# Altium PCB STM_System_Board.PCBDOC (part 7 of 16)
Units mm, origin at the board's own origin, x right, y up, seen from the top; angles counter-clockwise.
Board outline 222.53 x 100.01 mm, 6 copper layers (Top Layer, Int1 (GND), Int2 (Sign), Layer 1, Layer 2, Bottom Layer), stack 1.526 mm thick; 702 components, 774 nets, 3596 pads, 1988 vias.
Unrouted connection lines stored in the file: 1.
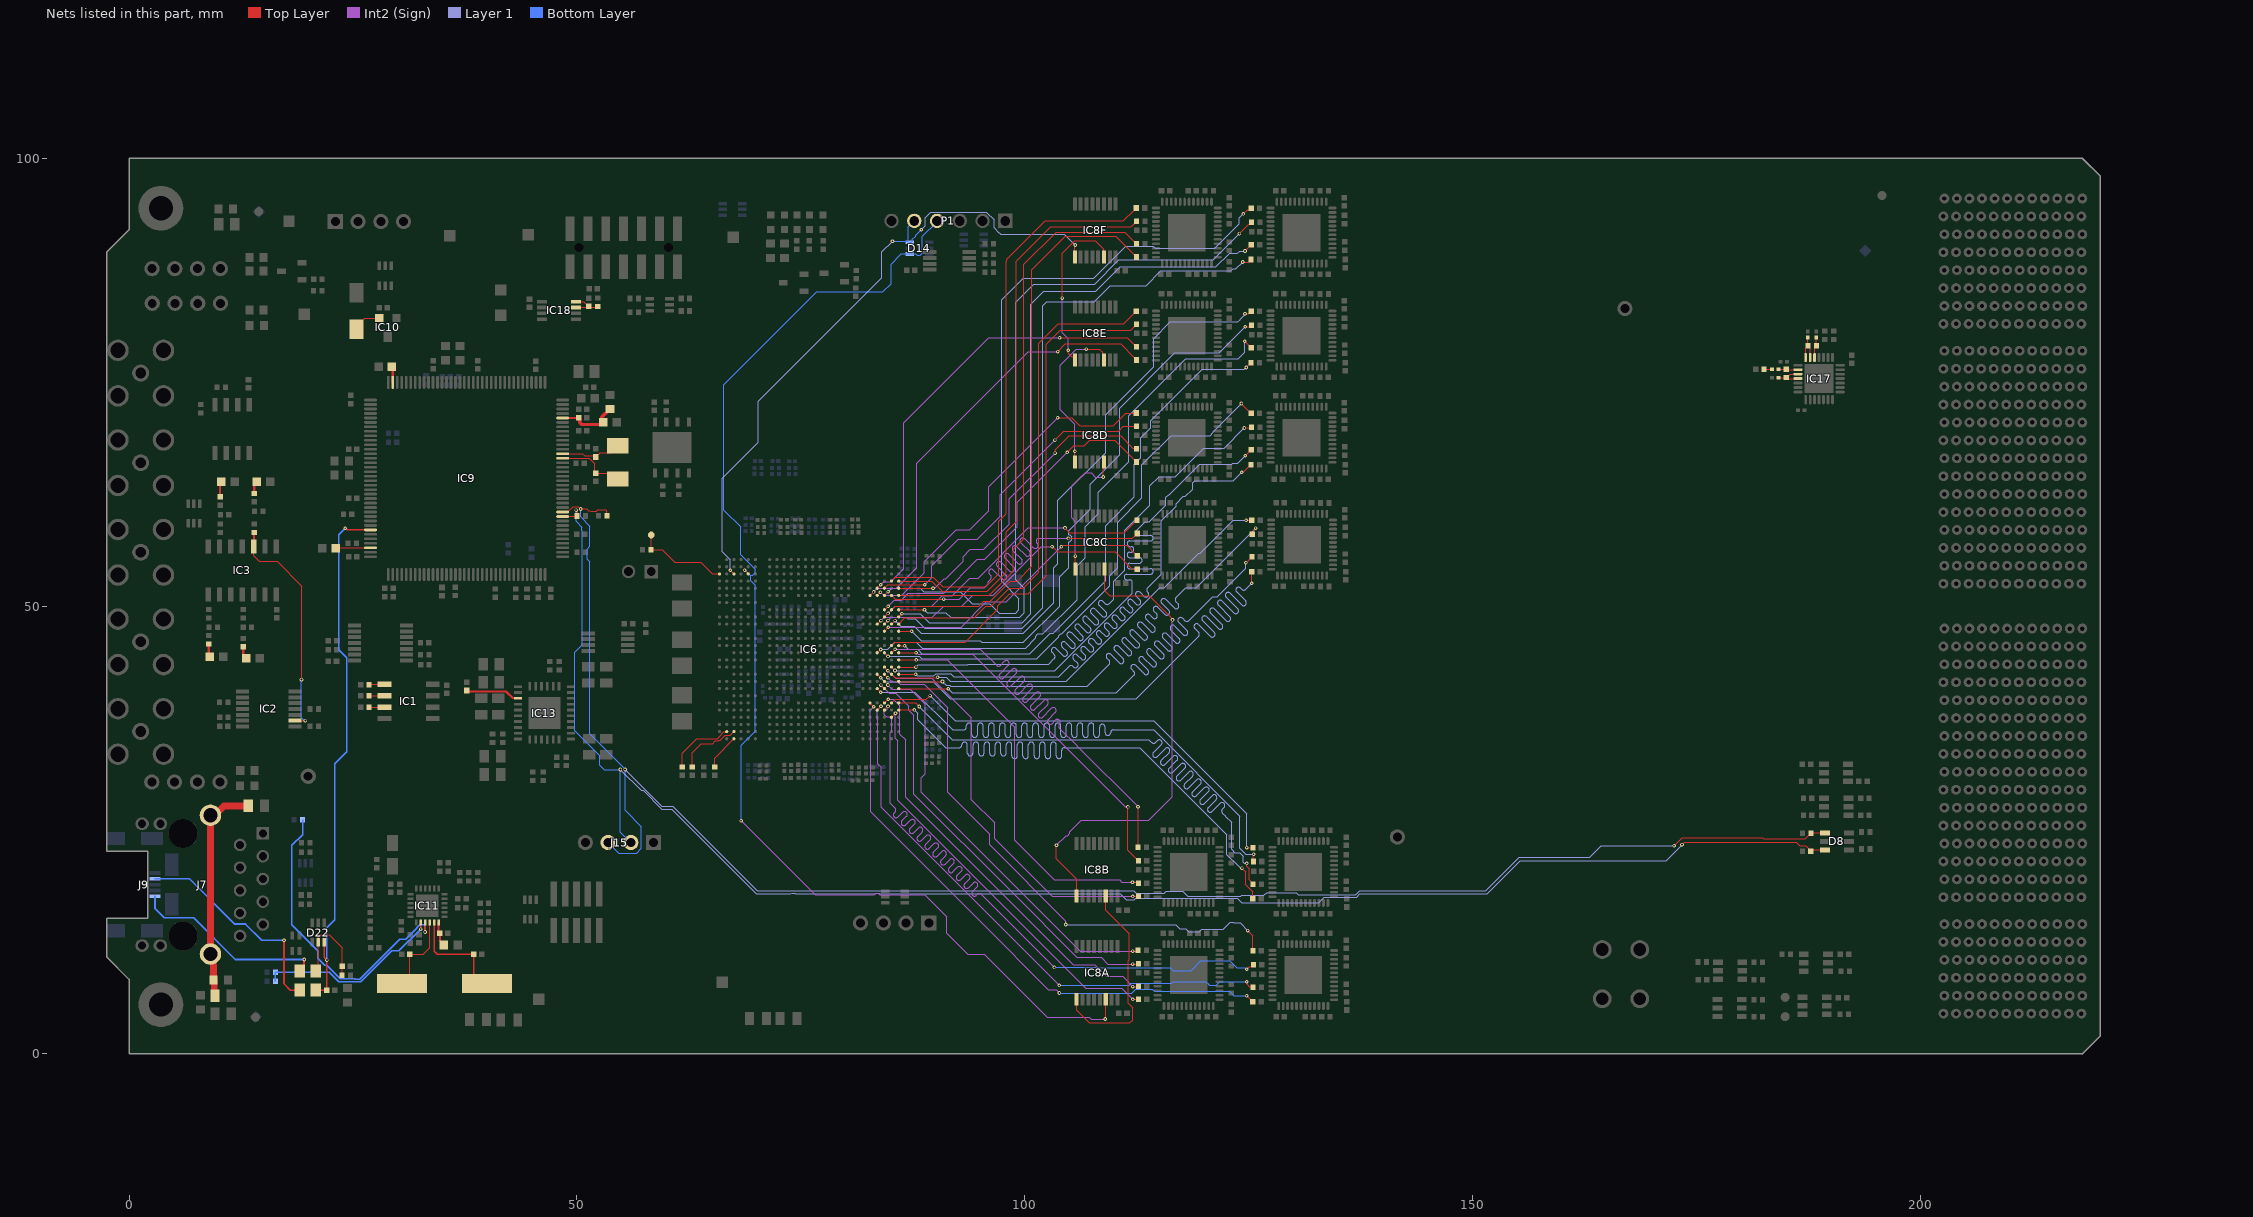
[diagram p10: the nets of this part, all layers, seen from the top]

## Via types
v1: diameter 0.4, hole 0.2, Top Layer to Bottom Layer, tented both sides, 1806 vias
v2: diameter 0.7, hole 0.4, Top Layer to Bottom Layer, tented both sides, 92 vias
v3: diameter 0.7, hole 0.4, Top Layer to Bottom Layer, 90 vias

## Nets (pads, with @x,y where several pads share a name; then routed paths per layer and width w, separated by ;. In a path a pad name is that pad's centre, name@x,y a point inside that pad or via, vN(x,y) a via of type N, cw(c..) or ccw(c..) an arc to the next point about the centre after c; other vN are vias at no path point) (continued)
IO1: IC6.AE25 R5.2 | length 7.5
  Top Layer w0.137: R5.2@61.758,32.044 61.758,33.566 63.396,35.204 65.695,35.204 65.93,35.44 65.93,35.475 66.398,35.943 66.674,35.943 IC6.AE25@66.715,35.984
IO2: IC6.AD25 R6.2 | length 7.2
  Top Layer w0.137: R6.2@62.862,32.044 62.862,33.621 63.891,34.65 65.159,34.65 65.449,34.94 65.804,34.94 65.876,35.013 66.013,35.013 66.555,35.555 67.086,35.555 IC6.AD25@67.515,35.984
IO3: IC6.AD26 R7.2 | length 4
  Top Layer w0.137: R7.2@65.358,32.044 65.358,33.027 IC6.AD26@67.515,35.184
LED1: IC11.2 R39.1 R55.1 | length 20.8
  Top Layer w0.152: v1(32.553,13.942) IC11.2@32.553,14.661
  Bottom Layer w0.152: R55.1@16.345,8.128 R39.1@16.345,9.144 22.352,9.144 23.416,8.08 25.866,8.08 29.304,11.519 30.13,11.519 v1(32.553,13.942)
LED2: IC11.3 R212.1 | length 34.5
  Top Layer w0.152: v1(33.053,13.614) IC11.3@33.053,14.661
  Bottom Layer w0.152: R212.1@19.364,26.162 19.364,24.493 18.161,23.29 18.161,14.423 21.082,11.502 21.082,10.668 21.844,9.906 22.087,9.906 23.586,8.407 25.185,8.407 25.233,8.36 25.75,8.36 30.217,12.827 30.875,12.827 31.757,13.709 31.757,13.717 32.445,14.404 33.053,14.404 v1(33.053,13.614)
M_SCL: D8.1 IC9.11 J15.3 R2.2 R262.1 | length 194.6
  Top Layer w0.127: IC9.11@48.41,60.496 48.985,60.496 49.585,61.096 50.129,61.096 50.392,60.833 v1(50.419,60.833) 51.079,60.833 51.257,60.655 51.451,60.655 51.527,60.579 52.146,60.579 52.299,60.731 53.213,60.731 53.263,60.681 53.353,60.592 R2.2@53.353,60.071 ; v1(172.466,23.241) 173.355,24.13 182.372,24.13 182.474,24.028 187.135,24.028 187.498,24.392 187.518,24.392 187.744,24.618 R262.1@187.744,24.638 ; R262.1@187.744,24.67 D8.1@189.298,24.67
  Layer 1 w0.127: v1(55.372,31.75) 57.459,29.663 57.482,29.663 59.48,27.664 60.71,27.664 70.148,18.226 111.775,18.226 111.783,18.234 112.144,18.234 112.428,17.95 115.57,17.95 115.791,18.172 117.279,18.172 117.288,18.163 117.629,18.163 118.168,17.624 124.115,17.624 124.188,17.697 126.689,17.697 127.003,18.011 130.299,18.011 130.54,17.771 136.94,17.771 137.396,18.226 151.449,18.226 155.194,21.971 163.068,21.971 164.329,23.232 172.457,23.232 v1(172.466,23.241)
  Bottom Layer w0.127: v1(50.419,60.833) 50.419,59.944 51.435,58.928 51.435,56.66 51.125,56.35 51.125,55.2 51.4,54.925 51.4,35.747 55.372,31.775 v1(55.372,31.75) 55.372,27.203 57.2,25.375 57.2,22.975 56.65,22.425 54.65,22.425 J15.3@53.475,23.6
M_SDA: D8.3 IC9.10 J15.2 R1.2 R263.1 | length 187.8
  Top Layer w0.127: IC9.10@48.41,59.996 49.96,59.996 R1.2@50.014,60.05 50.014,60.525 49.908,60.631 v1(49.908,60.705) ; v1(173.355,23.368) 173.38,23.368 173.644,23.631 186.096,23.631 186.508,23.219 187.15,23.219 187.73,22.639 R263.1@187.73,22.619 ; R263.1@187.722,22.77 D8.3@189.298,22.77
  Layer 1 w0.127: v1(54.845,31.75) 54.845,31.725 57.161,29.409 57.377,29.409 59.48,27.305 60.561,27.305 69.999,17.867 73.89,17.867 73.963,17.941 74.287,17.941 74.36,17.867 83.29,17.867 83.338,17.915 83.662,17.915 83.71,17.867 110.668,17.867 111.336,17.199 112.212,17.199 112.383,17.37 123.727,17.37 124.206,16.891 132.791,16.891 133.417,17.517 137.045,17.517 137.396,17.867 151.598,17.867 155.321,21.59 171.577,21.59 v1(173.355,23.368)
  Bottom Layer w0.127: v1(49.908,60.705) 49.908,59.439 50.537,58.81 50.537,58.385 50.609,58.312 50.609,45.685 49.775,44.85 49.775,36.05 52.525,33.3 52.525,32.25 53.025,31.75 v1(54.845,31.75) 54.845,24.77 J15.2@56.015,23.6
MISO: D14.6 IC6.AD3 IC8F.9 P1.5 | length 73.9
  Top Layer w0.127: v1(67.115,53.984) IC6.AD3@67.515,53.584 ; IC8F.9@105.579,88.979 105.579,90.252 v1(105.626,90.299)
  Layer 1 w0.127: v1(67.115,53.984) 67.115,55.16 66.225,56.05 66.225,64.275 70.25,68.3 70.25,72.875 84.025,86.65 84.025,89.525 v1(85.225,90.725) ; P1.5@87.655,92.992 P1.5@87.655,93.045 ; v1(88.425,92) 88.875,92.45 88.875,93.358 89.5,93.983 90.606,93.983 90.613,93.975 92.318,93.975 92.325,93.983 95.686,93.983 96.575,93.093 96.575,92.2 97.11,91.665 97.162,91.665 97.302,91.525 104.4,91.525 v1(105.626,90.299)
  Bottom Layer w0.127: v1(85.225,90.725) 87,90.725 87,92.337 P1.5@87.655,92.992 ; D14.6@87.125,90.6 87.305,90.6 87.441,90.737 87.441,90.916 87.825,91.3 87.825,91.4 v1(88.425,92)
MISOA: IC8A.9 IC8B.14 | length 23.4
  Top Layer w0.127: IC8A.9@105.775,6.106 105.775,4.875 107.175,3.475 111.725,3.475 112.025,3.775 112.025,5.175 111.55,5.65 111.55,10.425 111.66,10.535 111.66,13.415 109.025,16.05 IC8B.14@109.025,17.606
MISOB: IC8B.9 IC8C.14 | length 53.1
  Top Layer w0.127: v1(103.525,23.3) 103.525,21.775 105.775,19.525 IC8B.9@105.775,17.606 ; IC8C.14@108.894,54.146 108.894,51.731 109.475,51.15 113.875,51.15 116.09,48.935 116.376,48.649 116.376,48.623 116.475,48.524 v1(116.475,48.45)
  Int2 (Sign) w0.127: v1(103.525,23.3) 104.61,24.385 104.787,24.385 105.015,24.613 105.015,24.79 106.3,26.075 113.85,26.075 116.475,28.7 v1(116.475,48.45)
MISOC: IC8C.9 IC8D.14 | length 15.3
  Top Layer w0.127: v1(105.625,55.575) 105.644,55.556 IC8C.9@105.644,54.146 ; v1(108.75,64.4) IC8D.14@108.75,66.015
  Int2 (Sign) w0.127: v1(105.625,55.575) 105.644,55.594 105.644,59.475 105.253,59.865 105.253,63.376 106.752,64.875 107.4,64.875 107.875,64.4 v1(108.75,64.4)
MISOD: IC8D.9 IC8E.14 | length 18
  Top Layer w0.127: IC8D.9@105.579,66.094 v1(105.579,67.271) ; v1(106.85,78.675) 108.311,78.675 108.685,78.301 108.685,77.623 IC8E.14@108.829,77.479
  Int2 (Sign) w0.127: v1(105.579,67.271) 105.579,70.296 103.95,71.925 103.95,76.9 105.725,78.675 v1(106.85,78.675)
MISOE: IC8E.9 IC8F.14 | length 19.1
  Top Layer w0.127: v1(104.175,84.375) 104.175,89.4 105.55,90.775 107.875,90.775 108.829,89.821 IC8F.14@108.829,88.979 ; v1(104.85,78.55) 104.85,78.208 105.238,77.821 105.417,77.821 105.579,77.659 IC8E.9@105.579,77.479
  Int2 (Sign) w0.127: v1(104.175,84.375) 104.15,84.35 104.15,80.525 104.85,79.825 v1(104.85,78.55)
MLVDS_RxTx1_8: IC6.E21 R167A.1 | length 64.3
  Top Layer w0.127: IC6.E21@82.74,39.159 v1(83.14,38.759) ; v1(124.75,6.5) 125.197,6.053 125.218,6.053 125.445,5.826 R167A.1@125.445,5.806
  Int2 (Sign) w0.127: v1(83.14,38.759) 82.724,38.343 82.724,37.359 82.749,37.334 82.749,37.026 82.768,37.007 82.768,27.057 95.312,14.513 102.635,7.19 103.487,7.19 103.85,6.827 v1(103.85,6.8)
  Bottom Layer w0.127: v1(103.85,6.8) 111.95,6.8 112.375,7.225 113.442,7.225 113.448,7.231 114.219,7.231 114.475,6.975 122.85,6.975 123.325,6.5 v1(124.75,6.5)
MLVDS_RxTx1_9: IC6.D22 R169A.1 | length 62.9
  Top Layer w0.127: IC6.D22@83.541,38.415 v1(83.941,38.815) ; v1(124.76,8.056) 124.83,7.987 124.83,7.757 125.064,7.523 125.402,7.523 R169A.1@125.47,7.455
  Int2 (Sign) w0.127: v1(83.941,38.815) 83.525,38.399 83.525,37.351 83.55,37.326 83.55,37.053 83.564,37.039 83.564,32.415 83.954,32.025 83.954,27.548 96.309,15.194 103.825,7.677 v1(103.825,7.65)
  Bottom Layer w0.127: v1(103.825,7.65) 111.633,7.65 111.888,7.906 116.408,7.906 116.587,8.085 120.184,8.085 120.501,7.768 120.501,7.74 120.575,7.666 121.341,7.666 121.731,8.056 v1(124.76,8.056)
MLVDS_RxTx1_10: IC6.C22 R171A.1 | length 83.7
  Top Layer w0.127: IC6.C22@84.316,38.39 v1(84.716,38.79) ; v1(124.76,9.446) 125.071,9.757 125.281,9.757 R171A.1@125.505,9.981
  Int2 (Sign) w0.127: v1(84.716,38.79) 84.716,38.716 84.625,38.625 84.625,38.501 84.325,38.202 84.325,37.878 84.589,37.615 84.843,37.615 85.115,37.343 85.115,36.04 84.988,35.913 84.988,27.976 85.12,27.845 85.164,27.8 85.52,27.444 cw(c85.301,27.225) 85.52,27.006 85.407,26.893 ccw(c85.625,26.674) 85.407,26.455 ccw(c85.625,26.674) 85.844,26.455 86.346,26.957 cw(c86.565,26.738) 86.784,26.957 cw(c86.565,26.738) 86.784,26.519 86.282,26.017 ccw(c86.501,25.798) 86.282,25.579 ccw(c86.501,25.798) 86.72,25.579 87.222,26.081 ; 87.222,26.081 cw(c87.441,25.863) 87.659,26.081 cw(c87.441,25.863) 87.659,25.644 87.157,25.142 ccw(c87.376,24.923) 87.157,24.704 ccw(c87.376,24.923) 87.595,24.704 88.097,25.206 cw(c88.316,24.987) 88.535,25.206 cw(c88.316,24.987) 88.535,24.768 88.033,24.266 ccw(c88.252,24.047) 88.033,23.829 ccw(c88.252,24.047) 88.471,23.829 88.972,24.331 cw(c89.191,24.112) 89.41,24.331 cw(c89.191,24.112) 89.41,23.893 88.908,23.391 ccw(c89.127,23.172) 88.908,22.953 ccw(c89.127,23.172) 89.346,22.953 89.848,23.455 cw(c90.067,23.236) 90.286,23.455 cw(c90.067,23.236) 90.286,23.018 89.784,22.516 ccw(c90.002,22.297) 89.784,22.078 ccw(c90.002,22.297) 90.221,22.078 90.723,22.58 cw(c90.942,22.361) 91.161,22.58 cw(c90.942,22.361) 91.161,22.142 90.659,21.64 ccw(c90.878,21.421) 90.659,21.202 ccw(c90.878,21.421) 91.097,21.202 91.599,21.704 cw(c91.818,21.486) 92.036,21.704 cw(c91.818,21.486) 92.036,21.267 91.534,20.765 ccw(c91.753,20.546) 91.534,20.327 ccw(c91.753,20.546) 91.972,20.327 92.474,20.829 cw(c92.693,20.61) 92.912,20.829 cw(c92.693,20.61) 92.912,20.391 92.41,19.889 ccw(c92.629,19.67) 92.41,19.452 ccw(c92.629,19.67) 92.848,19.452 93.349,19.954 cw(c93.568,19.735) 93.787,19.954 cw(c93.568,19.735) 93.787,19.516 93.285,19.014 ccw(c93.504,18.795) 93.285,18.576 ccw(c93.504,18.795) 93.723,18.576 94.225,19.078 cw(c94.444,18.859) 94.663,19.078 cw(c94.444,18.859) 94.663,18.641 94.161,18.139 ccw(c94.379,17.92) 94.161,17.701 ccw(c94.379,17.92) 94.598,17.701 94.712,17.814 cw(c94.931,17.596) 95.15,17.814 95.195,17.77 v1(103.299,9.666)
  Bottom Layer w0.127: v1(103.299,9.666) 107.837,9.666 107.868,9.635 116.216,9.635 116.536,9.315 118.558,9.315 119.644,10.4 122.85,10.4 123.625,9.625 123.658,9.625 123.663,9.62 123.987,9.62 123.992,9.625 124.549,9.625 124.728,9.446 v1(124.76,9.446)
MLVDS_RxTx1_11: IC6.C17 R173A.1 | length 62.2
  Top Layer w0.127: IC6.C17@84.315,42.384 v1(84.715,41.984) ; v1(124.875,13.775) 125.455,13.195 R173A.1@125.455,11.531
  Int2 (Sign) w0.127: v1(84.715,41.984) 85.124,41.575 85.8,41.575 86.1,41.275 88.775,41.275 91.4,38.65 91.4,29.2 96.05,24.55 96.05,23.325 104.55,14.825 v1(104.55,14.45)
  Layer 1 w0.127: v1(104.55,14.45) 116.825,14.45 117.312,13.963 117.962,13.963 118.272,13.653 118.964,13.653 118.977,13.641 119.491,13.641 119.75,13.9 122.154,13.9 122.938,14.684 123.262,14.684 123.325,14.621 124.029,14.621 v1(124.875,13.775)
MLVDS_RxTx1_12: IC6.B23 R175A.1 | length 46.5
  Top Layer w0.127: IC6.B23@85.115,37.584 v1(85.556,38.025) ; v1(112.05,6.09) R175A.1@112.67,6.09
  Int2 (Sign) w0.127: v1(85.556,38.025) 85.556,35.219 85.791,34.984 85.791,28.309 106.775,7.325 110.815,7.325 v1(112.05,6.09)
MLVDS_RxTx1_13: IC6.C21 R184A.1 | length 47.4
  Top Layer w0.127: IC6.C21@84.315,39.184 84.324,39.184 84.74,39.6 v1(84.75,39.6) ; v1(112.05,7.515) 112.629,7.515 R184A.1@112.67,7.556
  Int2 (Sign) w0.127: v1(84.75,39.6) 85.3,39.6 86.05,38.85 86.05,35.675 86.675,35.05 86.675,28.675 105.375,9.975 107.825,9.975 109.15,8.65 110.915,8.65 v1(112.05,7.515)
MLVDS_RxTx1_14: IC6.C19 R191A.1 | length 47.6
  Top Layer w0.127: v1(83.925,41.174) IC6.C19@84.315,40.784 ; v1(112.05,10.025) 112.639,10.025 R191A.1@112.67,10.056
  Int2 (Sign) w0.127: v1(83.925,41.174) 84.849,40.25 85.575,40.25 87.025,38.8 87.025,38.375 87.6,37.8 87.6,29 98.4,18.2 105.8,10.8 108.5,10.8 109.275,10.025 v1(112.05,10.025)
MLVDS_RxTx1_15: IC6.C18 R193A.1 | length 47.2
  Top Layer w0.127: IC6.C18@84.315,41.584 v1(84.715,41.184) ; v1(112.05,11.479) 112.553,11.479 R193A.1@112.63,11.556
  Int2 (Sign) w0.127: v1(84.715,41.184) 85.174,40.725 87.225,40.725 88.9,39.05 88.9,31.3 88.45,30.85 88.45,29.225 98.938,18.738 106.196,11.479 v1(112.05,11.479)
MLVDS_RxTx8B: IC6.A22 R167B.1 | length 77.1
  Top Layer w0.127: IC6.A22@85.915,38.384 85.927,38.397 87.646,38.397 v1(87.659,38.409) ; v1(124.225,20.75) 124.65,20.325 124.65,18.906 125.445,18.111 R167B.1@125.445,17.306
  Layer 1 w0.127: v1(87.659,38.409) 88.063,38.005 88.063,37.287 91.15,34.2 92.6,34.2 92.664,34.2 ccw(c92.664,34.509) 92.973,34.509 92.973,34.511 cw(c93.283,34.511) 93.283,34.821 cw(c93.283,34.511) 93.592,34.511 93.592,33.589 ccw(c93.902,33.589) 93.902,33.279 ccw(c93.902,33.589) 94.211,33.589 94.211,34.511 cw(c94.521,34.511) 94.521,34.821 cw(c94.521,34.511) 94.83,34.511 94.83,33.589 ccw(c95.14,33.589) 95.14,33.279 ccw(c95.14,33.589) 95.449,33.589 95.449,34.511 cw(c95.759,34.511) 95.759,34.821 cw(c95.759,34.511) 96.068,34.511 96.068,33.589 ccw(c96.378,33.589) 96.378,33.279 ccw(c96.378,33.589) 96.687,33.589 96.687,34.511 cw(c96.997,34.511) 96.997,34.821 cw(c96.997,34.511) 97.306,34.511 97.306,33.589 ccw(c97.616,33.589) 97.616,33.279 ccw(c97.616,33.589) 97.925,33.589 97.925,34.511 cw(c98.235,34.511) 98.235,34.821 cw(c98.235,34.511) 98.544,34.511 98.544,33.276 ccw(c98.854,33.276) 98.854,32.967 ccw(c98.854,33.276) 99.163,33.276 99.163,34.511 cw(c99.473,34.511) 99.473,34.821 cw(c99.473,34.511) 99.782,34.511 99.782,33.276 ccw(c100.092,33.276) 100.092,32.967 ccw(c100.092,33.276) 100.401,33.276 100.401,34.511 cw(c100.711,34.511) 100.711,34.821 cw(c100.711,34.511) 101.02,34.511 101.02,33.276 ccw(c101.33,33.276) 101.33,32.967 ccw(c101.33,33.276) 101.639,33.276 101.639,34.511 cw(c101.949,34.511) 101.949,34.821 cw(c101.949,34.511) 102.258,34.511 102.258,33.276 ccw(c102.568,33.276) 102.568,32.967 ccw(c102.568,33.276) 102.877,33.276 102.877,34.511 cw(c103.187,34.511) 103.187,34.821 cw(c103.187,34.511) 103.496,34.511 103.496,33.276 ccw(c103.806,33.276) 103.806,32.967 ccw(c103.806,33.276) 104.115,33.276 104.115,33.89 cw(c104.425,33.89) 104.425,34.2 107.35,34.2 112.825,34.2 122.55,24.475 122.55,22.258 123.688,21.12 123.705,21.12 124.023,20.802 124.173,20.802 v1(124.225,20.75)
MLVDS_RxTx8C: IC6.D17 R167C.1 | length 72.7
  Top Layer w0.127: IC6.D17@83.515,42.384 v1(83.915,41.984) ; v1(125.314,52.539) R167C.1@125.314,53.846
  Layer 1 w0.127: v1(83.915,41.984) 84.324,41.575 89.75,41.575 91.65,39.675 112.45,39.675 119.35,46.575 119.395,46.62 ccw(c119.176,46.839) 119.395,47.058 118.961,47.492 cw(c119.179,47.711) 118.961,47.93 cw(c119.179,47.711) 119.398,47.93 120.705,46.623 ccw(c120.924,46.842) 121.142,46.623 ccw(c120.924,46.842) 121.142,47.061 119.836,48.367 cw(c120.055,48.586) 119.836,48.805 cw(c120.055,48.586) 120.274,48.805 121.58,47.499 ccw(c121.799,47.717) 122.018,47.499 ccw(c121.799,47.718) 122.018,47.936 120.711,49.243 cw(c120.93,49.462) 120.711,49.68 cw(c120.93,49.462) 121.149,49.68 122.455,48.374 ccw(c122.674,48.593) 122.893,48.374 ccw(c122.674,48.593) 122.893,48.812 121.587,50.118 cw(c121.806,50.337) 121.587,50.556 cw(c121.806,50.337) 122.024,50.556 123.331,49.249 ccw(c123.55,49.468) 123.769,49.249 ccw(c123.55,49.468) 123.769,49.687 122.462,50.994 cw(c122.681,51.212) 122.462,51.431 cw(c122.681,51.212) 122.9,51.431 124.206,50.125 ccw(c124.425,50.344) 124.644,50.125 ccw(c124.425,50.344) 124.644,50.563 123.636,51.571 cw(c123.855,51.79) 123.636,52.008 cw(c123.855,51.79) 124.073,52.008 124.21,51.872 ccw(c124.428,52.091) 124.647,51.872 125.025,52.25 v1(125.314,52.539)
MLVDS_RxTx8D: IC6.A17 R167D.1 | length 71.7
  Top Layer w0.127: IC6.A17@85.915,42.384 v1(87.8,42.384) ; v1@124.196,64.925 v1(124.211,64.939) 124.263,64.992 124.413,64.992 124.421,65 124.455,65 125.002,65.548 125.022,65.548 125.249,65.774 R167D.1@125.249,65.794
  Layer 1 w0.127: v1(87.8,42.384) 87.827,42.384 88.011,42.2 89.848,42.2 90.088,42.44 91.71,42.44 92.05,42.1 103.775,42.1 104.45,42.775 104.933,43.258 cw(c105.151,43.039) 105.37,43.258 105.416,43.212 ccw(c105.635,43.431) 105.854,43.212 ccw(c105.635,43.431) 105.854,43.649 105.425,44.078 cw(c105.644,44.297) 105.425,44.516 cw(c105.644,44.297) 105.863,44.516 106.292,44.087 ccw(c106.51,44.306) 106.729,44.087 ccw(c106.51,44.306) 106.729,44.525 106.301,44.954 cw(c106.519,45.172) 106.301,45.391 cw(c106.519,45.172) 106.738,45.391 107.167,44.963 ccw(c107.386,45.181) 107.605,44.963 ccw(c107.386,45.181) 107.605,45.4 107.176,45.829 cw(c107.395,46.048) 107.176,46.267 cw(c107.395,46.048) 107.614,46.267 108.042,45.838 ccw(c108.261,46.057) 108.48,45.838 ccw(c108.261,46.057) 108.48,46.276 108.051,46.704 cw(c108.27,46.923) 108.051,47.142 cw(c108.27,46.923) 108.489,47.142 108.918,46.713 ccw(c109.137,46.932) 109.356,46.713 ccw(c109.137,46.932) 109.356,47.151 108.927,47.58 cw(c109.146,47.799) 108.927,48.017 cw(c109.146,47.799) 109.364,48.018 109.793,47.589 ccw(c110.012,47.808) 110.231,47.589 ccw(c110.012,47.808) 110.231,48.026 109.802,48.455 cw(c110.021,48.674) 109.802,48.893 cw(c110.021,48.674) 110.24,48.893 110.669,48.464 ccw(c110.887,48.683) 111.106,48.464 ccw(c110.887,48.683) 111.106,48.902 110.678,49.331 cw(c110.896,49.549) 110.678,49.768 cw(c110.896,49.549) 111.115,49.768 111.544,49.34 ccw(c111.763,49.558) 111.982,49.34 ccw(c111.763,49.558) 111.982,49.777 111.553,50.206 cw(c111.772,50.425) 111.553,50.644 cw(c111.772,50.425) 111.991,50.644 112.419,50.215 ccw(c112.638,50.434) 112.857,50.215 ccw(c112.638,50.434) 112.857,50.653 112.426,51.084 cw(c112.645,51.303) 112.426,51.522 cw(c112.645,51.303) 112.864,51.522 113.295,51.09 ccw(c113.514,51.309) 113.732,51.09 ccw(c113.514,51.309) 113.732,51.528 113.687,51.574 cw(c113.905,51.793) 113.687,52.012 114.212,52.537 115.225,53.55 115.225,59.5 116.87,61.145 116.87,61.417 117.693,62.24 117.924,62.24 118.747,63.062 118.747,63.763 118.976,63.991 121.112,63.991 121.119,63.984 123.256,63.984 v1(124.211,64.939)
MLVDS_RxTx8E: IC6.A13 R167E.1 | length 60.7
  Top Layer w0.127: IC6.A13@85.915,45.584 85.924,45.575 v1(86.575,45.575) ; v1(124.7,76.63) 125.002,76.933 125.022,76.933 125.249,77.159 R167E.1@125.249,77.179
  Layer 1 w0.127: v1(86.575,45.575) 86.975,45.175 88.021,45.175 88.495,44.7 100.563,44.7 102.813,46.95 103.175,46.95 109.025,52.8 109.025,58.975 112.225,62.175 112.225,65.825 112.925,66.525 112.925,68.8 114.034,69.909 114.034,70.659 119.8,76.425 124.489,76.425 124.695,76.63 v1(124.7,76.63)
MLVDS_RxTx8F: IC6.C10 R167F.1 | length 78.6
  Top Layer w0.127: IC6.C10@84.315,47.984 v1(84.706,48.375) ; v1(124.325,88.4) 124.97,88.4 125.002,88.433 125.022,88.433 125.249,88.659 R167F.1@125.249,88.679
  Layer 1 w0.127: v1(84.706,48.375) 85.081,48.75 85.329,48.75 85.344,48.766 85.668,48.766 85.683,48.75 86.75,48.75 86.9,48.6 87.75,48.6 88.825,47.525 99.7,47.525 101.975,49.8 101.975,83.5 102.425,83.95 107.725,83.95 109.55,85.775 113.55,85.775 115.175,87.4 122.998,87.4 123.238,87.641 123.565,87.641 v1(124.325,88.4)
MLVDS_RxTx9B: IC6.A21 R169B.1 | length 78
  Top Layer w0.127: IC6.A21@85.915,39.184 87.807,39.184 v1(88.207,38.784) ; v1(124.775,21.275) 124.775,20.925 125.025,20.675 125.025,19.421 125.47,18.975 R169B.1@125.47,18.955
  Layer 1 w0.127: v1(88.207,38.784) 91.916,35.075 113.85,35.075 114.112,34.813 114.157,34.768 ccw(c114.376,34.986) 114.595,34.768 114.79,34.963 cw(c115.009,34.744) 115.228,34.963 cw(c115.009,34.744) 115.228,34.525 114.34,33.637 ccw(c114.559,33.419) 114.34,33.2 ccw(c114.559,33.419) 114.778,33.2 115.666,34.087 cw(c115.885,33.869) 116.103,34.087 cw(c115.885,33.869) 116.103,33.65 115.216,32.762 ccw(c115.435,32.543) 115.216,32.324 ccw(c115.435,32.543) 115.653,32.324 116.541,33.212 cw(c116.76,32.993) 116.979,33.212 cw(c116.76,32.993) 116.979,32.774 116.091,31.887 ccw(c116.31,31.668) 116.091,31.449 ccw(c116.31,31.668) 116.529,31.449 117.417,32.337 cw(c117.635,32.118) 117.854,32.337 cw(c117.635,32.118) 117.854,31.899 116.967,31.011 ccw(c117.185,30.792) 116.967,30.574 ccw(c117.185,30.792) 117.404,30.574 118.292,31.461 cw(c118.511,31.242) 118.73,31.461 cw(c118.511,31.242) 118.73,31.023 117.842,30.136 ccw(c118.061,29.917) 117.842,29.698 ccw(c118.061,29.917) 118.28,29.698 119.167,30.586 cw(c119.386,30.367) 119.605,30.586 cw(c119.386,30.367) 119.605,30.148 118.717,29.26 ccw(c118.936,29.042) 118.717,28.823 ccw(c118.936,29.042) 119.155,28.823 120.043,29.71 cw(c120.262,29.492) 120.48,29.71 cw(c120.262,29.492) 120.48,29.273 119.593,28.385 ccw(c119.812,28.166) 119.593,27.947 ccw(c119.812,28.166) 120.03,27.947 120.918,28.835 cw(c121.137,28.616) 121.356,28.835 cw(c121.137,28.616) 121.356,28.397 120.468,27.51 ccw(c120.687,27.291) 120.468,27.072 ccw(c120.687,27.291) 120.906,27.072 121.793,27.96 cw(c122.012,27.741) 122.231,27.96 cw(c122.012,27.741) 122.231,27.522 122.036,27.327 ccw(c122.255,27.108) 122.036,26.889 122.343,26.582 122.388,26.537 123.075,25.85 123.075,22.85 123.45,22.475 124,22.475 124.4,22.075 124.4,21.4 124.501,21.299 124.751,21.299 v1(124.775,21.275)
MLVDS_RxTx9C: IC6.A19 R169C.1 | length 68
  Top Layer w0.127: IC6.A19@85.915,40.784 91.413,40.784 v1(91.44,40.757) ; v1(124.669,54.825) 125.092,55.248 125.112,55.248 125.339,55.475 R169C.1@125.339,55.495
  Layer 1 w0.127: v1(91.44,40.757) 91.897,40.3 110.219,40.3 112.122,42.203 112.167,42.248 ccw(c111.948,42.467) 112.167,42.686 111.912,42.94 cw(c112.131,43.159) 111.912,43.378 cw(c112.131,43.159) 112.35,43.378 113.297,42.431 ccw(c113.516,42.65) 113.735,42.431 ccw(c113.516,42.65) 113.735,42.868 112.788,43.816 cw(c113.006,44.035) 112.788,44.253 cw(c113.006,44.035) 113.225,44.253 114.173,43.306 ccw(c114.391,43.525) 114.61,43.306 ccw(c114.391,43.525) 114.61,43.744 113.663,44.691 cw(c113.882,44.91) 113.663,45.129 cw(c113.882,44.91) 114.101,45.129 115.048,44.182 ccw(c115.267,44.4) 115.486,44.182 ccw(c115.267,44.4) 115.486,44.619 114.538,45.566 cw(c114.757,45.785) 114.538,46.004 cw(c114.757,45.785) 114.976,46.004 115.923,45.057 ccw(c116.142,45.276) 116.361,45.057 ccw(c116.142,45.276) 116.361,45.495 115.414,46.442 cw(c115.633,46.661) 115.414,46.88 cw(c115.633,46.661) 115.852,46.88 116.799,45.932 ccw(c117.018,46.151) 117.236,45.932 ccw(c117.018,46.151) 117.236,46.37 116.289,47.317 cw(c116.508,47.536) 116.289,47.755 cw(c116.508,47.536) 116.727,47.755 117.674,46.808 ccw(c117.893,47.027) 118.112,46.808 ccw(c117.893,47.027) 118.112,47.245 117.165,48.193 cw(c117.383,48.412) 117.165,48.63 cw(c117.383,48.412) 117.602,48.63 117.857,48.376 ccw(c118.076,48.594) 118.295,48.376 118.805,48.886 120.975,51.056 121.483,51.056 124.669,54.242 v1(124.669,54.825)
MLVDS_RxTx9D: IC6.B16 R169D.1 | length 69.3
  Top Layer w0.127: IC6.B16@85.115,43.184 v1(85.499,42.8) ; v1(124.606,66.775) 125.027,67.197 125.047,67.197 125.274,67.423 R169D.1@125.274,67.443
  Layer 1 w0.127: v1(85.499,42.8) 85.524,42.774 103.324,42.774 112,51.45 112,52.557 112,52.621 ccw(c111.691,52.621) 111.691,52.93 111.393,52.93 cw(c111.393,53.24) 111.084,53.24 cw(c111.393,53.24) 111.393,53.549 114.019,53.549 ccw(c114.019,53.859) 114.328,53.859 ccw(c114.019,53.859) 114.019,54.168 111.714,54.168 cw(c111.714,54.478) 111.404,54.478 cw(c111.714,54.478) 111.714,54.787 112.779,54.787 ccw(c112.779,55.097) 113.088,55.097 ccw(c112.779,55.097) 112.779,55.406 111.714,55.406 cw(c111.714,55.716) 111.404,55.716 cw(c111.714,55.716) 111.714,56.025 111.859,56.025 ccw(c111.859,56.335) 112.168,56.335 ccw(c111.859,56.335) 111.859,56.644 111.714,56.644 cw(c111.714,56.954) 111.404,56.954 cw(c111.714,56.954) 111.714,57.263 114.019,57.263 ccw(c114.019,57.573) 114.328,57.573 ccw(c114.019,57.573) 114.019,57.882 112.655,57.882 cw(c112.655,58.192) 112.436,58.411 112.675,58.65 113.425,59.4 113.9,59.4 115.724,61.224 115.724,62.127 116.047,62.449 116.127,62.449 119.502,65.825 123.107,65.825 123.192,65.91 123.741,65.91 v1(124.606,66.775)
MLVDS_RxTx9E: IC6.D14 R169E.1 | length 66.5
  Top Layer w0.127: IC6.D14@83.515,44.809 83.559,44.809 v1(83.9,45.15) ; v1(124.552,79.55) 125.027,79.075 125.047,79.075 125.274,78.848 R169E.1@125.274,78.828
  Layer 1 w0.127: v1(83.9,45.15) 84.675,45.15 85.475,45.95 86.41,45.95 86.425,45.965 87.885,45.965 88.55,45.3 100.1,45.3 101.231,46.431 101.231,46.653 101.46,46.882 102.007,46.882 105.85,50.725 105.85,54.5 106.725,55.375 106.725,58.825 108.2,60.3 108.2,62.7 111.612,66.112 111.612,71.237 117.95,77.575 123.825,77.575 124.552,78.302 v1(124.552,79.55)
MLVDS_RxTx9F: IC6.A9 R169F.1 | length 77.6
  Top Layer w0.127: IC6.A9@85.915,48.784 v1(86.275,49.144) ; v1(124.575,89.629) 125.027,90.082 125.047,90.082 125.274,90.308 R169F.1@125.274,90.328
  Layer 1 w0.127: v1(86.275,49.144) 88.306,49.144 89.3,48.15 99.7,48.15 100.675,49.125 100.675,83.675 102.125,85.125 107.925,85.125 110.65,87.85 121.325,87.85 122.85,89.375 123.707,89.375 123.961,89.629 v1(124.575,89.629)
MLVDS_RxTx10B: IC6.D19 R171B.1 | length 86.7
  Top Layer w0.127: IC6.D19@83.515,40.784 v1(83.915,40.384) ; R171B.1@125.505,21.481 125.505,22.28 v1(125.525,22.3)
  Layer 1 w0.127: v1(83.915,40.384) 87.716,40.384 91.925,36.175 93.1,36.175 93.164,36.175 ccw(c93.164,36.484) 93.473,36.484 93.473,36.637 cw(c93.783,36.637) 93.783,36.946 cw(c93.783,36.637) 94.092,36.637 94.092,35.638 ccw(c94.402,35.638) 94.402,35.329 ccw(c94.402,35.638) 94.711,35.638 94.711,36.637 cw(c95.021,36.637) 95.021,36.946 cw(c95.021,36.637) 95.33,36.637 95.33,35.638 ccw(c95.64,35.638) 95.64,35.329 ccw(c95.64,35.638) 95.949,35.638 95.949,36.637 cw(c96.259,36.637) 96.259,36.946 cw(c96.259,36.637) 96.568,36.637 96.568,35.638 ccw(c96.878,35.638) 96.878,35.329 ccw(c96.878,35.638) 97.187,35.638 97.187,36.637 cw(c97.497,36.637) 97.497,36.946 cw(c97.497,36.637) 97.806,36.637 97.806,35.638 ccw(c98.116,35.638) 98.116,35.329 ccw(c98.116,35.638) 98.425,35.638 98.425,36.637 cw(c98.735,36.637) 98.735,36.946 cw(c98.735,36.637) 99.044,36.637 99.044,35.638 ccw(c99.354,35.638) 99.354,35.329 ccw(c99.354,35.638) 99.663,35.638 99.663,36.637 cw(c99.973,36.637) 99.973,36.946 cw(c99.973,36.637) 100.282,36.637 100.282,35.638 ccw(c100.592,35.638) 100.592,35.329 ccw(c100.592,35.638) 100.901,35.638 100.901,36.637 cw(c101.211,36.637) 101.211,36.946 cw(c101.211,36.637) 101.52,36.637 101.52,35.638 ccw(c101.83,35.638) 101.83,35.329 ccw(c101.83,35.638) 102.139,35.638 102.139,36.637 cw(c102.449,36.637) 102.449,36.946 cw(c102.449,36.637) 102.758,36.637 102.758,35.638 ccw(c103.068,35.638) 103.068,35.329 ccw(c103.068,35.638) 103.377,35.638 103.377,36.637 cw(c103.687,36.637) 103.687,36.946 cw(c103.687,36.637) 103.996,36.637 103.996,35.638 ccw(c104.306,35.638) 104.306,35.329 ccw(c104.306,35.638) 104.615,35.638 104.615,36.637 cw(c104.925,36.637) 104.925,36.946 cw(c104.925,36.637) 105.234,36.637 105.234,35.638 ccw(c105.544,35.638) 105.544,35.329 ccw(c105.544,35.638) 105.853,35.638 105.853,36.637 cw(c106.163,36.637) 106.163,36.946 cw(c106.163,36.637) 106.472,36.637 106.472,35.638 ccw(c106.782,35.638) 106.782,35.329 ccw(c106.782,35.638) 107.091,35.638 107.091,36.637 cw(c107.401,36.637) 107.401,36.946 cw(c107.401,36.637) 107.71,36.637 107.71,35.638 ccw(c108.02,35.638) 108.02,35.329 ccw(c108.02,35.638) 108.329,35.638 108.329,36.487 cw(c108.639,36.487) 108.639,36.797 cw(c108.639,36.487) 108.948,36.487 108.948,35.865 ccw(c109.258,35.865) 109.258,35.556 ccw(c109.258,35.865) 109.567,35.865 cw(c109.877,35.865) 109.877,36.175 112.975,36.175 114.375,36.175 123.99,26.56 123.99,22.96 124.65,22.3 v1(125.525,22.3)
MLVDS_RxTx10C: IC6.A18 R171C.1 | length 72.8
  Top Layer w0.127: IC6.A18@85.915,41.584 85.924,41.575 v1(90.8,41.575) ; R171C.1@125.374,58.021 125.522,58.17 125.522,58.447 v1(125.775,58.7)
  Layer 1 w0.127: v1(90.8,41.575) 91.227,41.148 91.602,41.148 91.724,41.025 106.95,41.025 109.363,43.437 109.407,43.482 ccw(c109.189,43.701) 109.407,43.92 109.153,44.175 cw(c109.372,44.394) 109.153,44.612 cw(c109.372,44.394) 109.59,44.612 110.538,43.665 ccw(c110.756,43.884) 110.975,43.665 ccw(c110.756,43.884) 110.975,44.103 110.028,45.05 cw(c110.247,45.269) 110.028,45.488 cw(c110.247,45.269) 110.466,45.488 111.413,44.541 ccw(c111.632,44.76) 111.851,44.541 ccw(c111.632,44.76) 111.851,44.978 110.904,45.926 cw(c111.122,46.144) 110.904,46.363 cw(c111.122,46.144) 111.341,46.363 112.288,45.416 ccw(c112.507,45.635) 112.726,45.416 ccw(c112.507,45.635) 112.726,45.854 111.779,46.801 cw(c111.998,47.02) 111.779,47.239 cw(c111.998,47.02) 112.217,47.239 113.164,46.291 ccw(c113.383,46.51) 113.602,46.291 ccw(c113.383,46.51) 113.602,46.729 112.654,47.676 cw(c112.873,47.895) 112.654,48.114 cw(c112.873,47.895) 113.092,48.114 114.039,47.167 ccw(c114.258,47.386) 114.477,47.167 ccw(c114.258,47.386) 114.477,47.605 113.53,48.552 cw(c113.749,48.771) 113.53,48.989 cw(c113.749,48.771) 113.967,48.989 114.271,48.686 ccw(c114.49,48.905) 114.709,48.686 ccw(c114.49,48.905) 114.709,49.124 114.405,49.427 cw(c114.624,49.646) 114.405,49.865 cw(c114.624,49.646) 114.843,49.865 115.623,49.084 ccw(c115.842,49.303) 116.061,49.084 ccw(c115.842,49.303) 116.061,49.522 115.281,50.303 cw(c115.499,50.521) 115.281,50.74 cw(c115.499,50.521) 115.718,50.74 116.665,49.793 ccw(c116.884,50.012) 117.103,49.793 ccw(c116.884,50.012) 117.103,50.231 116.848,50.486 cw(c117.067,50.704) 116.848,50.923 117.275,51.35 117.981,52.056 119.131,52.056 v1(125.775,58.7)
MLVDS_RxTx10D: IC6.A16 R171D.1 | length 73.7
  Top Layer w0.127: IC6.A16@85.915,43.184 v1(87.834,43.184) ; v1(124.5,69.875) 125.215,69.875 R171D.1@125.309,69.969
  Layer 1 w0.127: v1(87.834,43.184) 88.1,43.45 93.625,43.45 93.696,43.521 102.671,43.521 103.237,44.088 103.282,44.132 ccw(c103.064,44.351) 103.282,44.57 103.028,44.825 cw(c103.247,45.044) 103.028,45.263 cw(c103.247,45.044) 103.465,45.263 104.241,44.487 ccw(c104.459,44.706) 104.678,44.487 ccw(c104.459,44.706) 104.678,44.925 104.131,45.472 cw(c104.35,45.691) 104.131,45.91 cw(c104.35,45.691) 104.569,45.91 105.116,45.363 ccw(c105.335,45.582) 105.554,45.363 ccw(c105.335,45.582) 105.554,45.801 104.778,46.576 cw(c104.997,46.795) 104.778,47.013 cw(c104.997,46.795) 105.216,47.013 105.991,46.238 ccw(c106.21,46.457) 106.429,46.238 ccw(c106.21,46.457) 106.429,46.676 105.654,47.451 cw(c105.873,47.67) 105.654,47.889 cw(c105.873,47.67) 106.092,47.889 106.867,47.114 ccw(c107.086,47.332) 107.304,47.114 ccw(c107.086,47.332) 107.304,47.551 106.529,48.326 cw(c106.748,48.545) 106.529,48.764 cw(c106.748,48.545) 106.967,48.764 107.742,47.989 ccw(c107.961,48.208) 108.18,47.989 ccw(c107.961,48.208) 108.18,48.427 107.405,49.202 cw(c107.623,49.421) 107.405,49.64 cw(c107.624,49.421) 107.842,49.64 108.617,48.864 ccw(c108.836,49.083) 109.055,48.864 ccw(c108.836,49.083) 109.055,49.302 108.28,50.077 cw(c108.499,50.296) 108.28,50.515 cw(c108.499,50.296) 108.718,50.515 108.972,50.26 ccw(c109.191,50.479) 109.41,50.26 109.787,50.638 109.925,50.775 109.925,52.75 111.15,53.975 111.15,58.475 113.95,61.275 113.95,63.4 114.975,64.425 116.8,64.425 119.988,67.613 122.237,67.613 v1(124.5,69.875)
MLVDS_RxTx10E: IC6.A11 R171E.1 | length 64
  Top Layer w0.127: IC6.A11@85.915,47.184 v1(87.35,47.184) ; v1(124.6,81.175) 125.13,81.175 R171E.1@125.309,81.354
  Layer 1 w0.127: v1(87.35,47.184) 88.409,46.125 95.025,46.125 95.2,45.95 99.825,45.95 103.875,50 103.875,53.25 104.9,54.275 104.9,57.159 105.014,57.159 105.243,57.388 105.243,57.712 105.014,57.94 104.9,57.94 104.9,58.425 107.3,60.825 107.3,63.569 110.6,66.869 110.6,72.1 116.75,78.25 121.675,78.25 v1(124.6,81.175)
MLVDS_RxTx10F: IC6.A8 R171F.1 | length 79.6
  Top Layer w0.127: IC6.A8@85.915,49.584 v1(88.791,49.584) ; v1(123.95,91.575) 124.983,92.608 125.082,92.608 125.309,92.834 R171F.1@125.309,92.854
  Layer 1 w0.127: v1(88.791,49.584) 89.1,49.275 91.175,49.275 91.7,48.75 99.425,48.75 99.925,49.25 99.925,52 99,52.925 99,83.925 101,85.925 107.775,85.925 110.5,88.65 121.025,88.65 v1(123.95,91.575)
MLVDS_RxTx11B: IC6.B21 R173B.1 | length 49.9
  Top Layer w0.127: IC6.B21@85.115,39.184 85.506,39.575 88.994,39.575 v1(89.421,40.003) ; v1(124.76,23.031) R173B.1@125.455,23.031
  Layer 1 w0.127: v1(89.421,40.003) 92.224,37.2 114.4,37.2 124.76,26.84 v1(124.76,23.031)
MLVDS_RxTx11C: IC6.B17 R173C.1 | length 48
  Top Layer w0.127: IC6.B17@85.115,42.384 85.515,41.984 90.039,41.984 90.053,41.998 90.198,41.998 v1(90.25,42.05) ; v1(124.696,59.571) R173C.1@125.324,59.571
  Layer 1 w0.127: v1(90.25,42.05) 91.225,42.05 91.675,41.6 104.601,41.6 115.057,52.056 115.579,52.056 119.411,55.887 119.569,55.887 123.253,59.571 v1(124.696,59.571)
MLVDS_RxTx11D: IC6.C14 R173D.1 | length 59.4
  Top Layer w0.127: IC6.C14@84.315,44.784 v1(84.724,44.375) ; v1(124.175,72.603) 125.012,71.766 125.032,71.766 125.259,71.539 R173D.1@125.259,71.519
  Layer 1 w0.127: v1(84.724,44.375) 84.742,44.394 88.181,44.394 88.475,44.1 101.325,44.1 103.771,46.546 103.771,46.655 104,46.883 104.108,46.883 109.475,52.25 109.475,53.375 110.35,54.25 110.35,59.375 113.05,62.075 113.05,65.75 116.325,69.025 120.694,69.025 121.049,69.38 121.049,69.477 v1(124.175,72.603)
MLVDS_RxTx11E: IC6.B10 R173E.1 | length 66.6
  Top Layer w0.127: IC6.B10@85.115,47.984 v1(85.506,48.375) ; v1(124.575,82.625) 124.98,82.625 125.012,82.658 125.032,82.658 125.259,82.884 R173E.1@125.259,82.904
  Layer 1 w0.127: v1(85.506,48.375) 86.156,47.725 87.675,47.725 88.45,46.95 99.8,46.95 103.225,50.375 103.225,54.25 103.684,54.709 103.684,61.807 109,67.123 109,71.325 114.359,76.684 114.359,79.847 116.236,81.724 123.786,81.724 124.014,81.952 124.014,81.989 124.463,82.438 ; 124.463,82.44 124.575,82.551 v1(124.575,82.625)
MLVDS_RxTx11F: IC6.C6 R173F.1 | length 84.8
  Top Layer w0.127: IC6.C6@84.315,51.184 v1(84.725,51.594) ; v1(124.375,93.775) 124.853,94.253 125.107,94.253 R173F.1@125.259,94.404
  Layer 1 w0.127: v1(84.725,51.594) 85.131,52 88.325,52 88.731,51.594 92.781,51.594 94.125,50.25 96.075,50.25 97.125,49.2 98.975,49.2 99.34,49.565 99.34,50.809 97.4,52.75 97.4,84.2 99.8,86.6 107.675,86.6 111.25,90.175 114.325,90.175 114.55,89.95 121.175,89.95 122.528,91.303 122.554,91.303 123.94,92.69 123.94,93.34 v1(124.375,93.775)
MLVDS_RxTx12B: IC6.C16 R175B.1 | length 45.3
  Top Layer w0.127: IC6.C16@84.315,43.184 v1(84.715,42.784) ; v1(112.05,17.59) R175B.1@112.67,17.59
  Int2 (Sign) w0.127: v1(84.715,42.784) 85.574,41.925 89.625,41.925 94.038,37.513 94.038,28.387 96.638,25.787 96.638,24.013 97.063,23.588 103.06,17.59 v1(112.05,17.59)
MLVDS_RxTx12C: IC6.D10 R175C.1 | length 33.6
  Top Layer w0.127: IC6.D10@83.54,47.984 v1(83.931,48.375) ; v1(103.04,56.625) 103.1,56.625 103.675,56.05 110.075,56.05 111.996,54.129 R175C.1@112.539,54.129
  Int2 (Sign) w0.127: v1(83.931,48.375) 84.321,48.766 86.101,48.766 86.113,48.754 89.679,48.754 90.925,50 92.95,50 94.175,51.225 96.45,51.225 101.85,56.625 v1(103.04,56.625)
MLVDS_RxTx12D: IC6.C8 R175D.1 | length 38.6
  Top Layer w0.127: IC6.C8@84.34,49.584 v1(84.731,49.975) ; v1(104.725,67.15) 105.475,67.9 106.625,67.9 107.225,68.5 110.051,68.5 112.227,66.324 112.247,66.324 112.474,66.098 R175D.1@112.474,66.078
  Int2 (Sign) w0.127: v1(84.731,49.975) 85.418,50.662 86.212,50.662 87,51.45 90.925,51.45 94.675,55.2 95.5,55.2 99.175,58.875 99.175,61.6 v1(104.725,67.15)
MLVDS_RxTx12E: IC6.E6 R175E.1 | length 49
  Top Layer w0.127: IC6.E6@82.715,51.184 v1(83.106,51.575) ; v1(103.675,78.4) 104.525,79.25 110.686,79.25 112.227,77.709 112.247,77.709 112.474,77.483 R175E.1@112.474,77.463
  Int2 (Sign) w0.127: v1(83.106,51.575) 83.515,51.985 83.744,51.985 84.068,51.985 85.142,51.985 85.148,51.991 85.64,51.991 87.925,54.275 87.925,65.925 100.4,78.4 v1(103.675,78.4)
MLVDS_RxTx12F: IC6.B8 R175F.1 | length 65
  Top Layer w0.127: IC6.B8@85.115,49.584 85.506,49.975 94.85,49.975 95.425,50.55 96.125,50.55 98.35,52.775 99.125,52.775 100.775,54.425 100.775,87.55 104.5,91.275 110.161,91.275 112.227,89.209 112.247,89.209 112.474,88.983 R175F.1@112.474,88.963
MLVDS_RxTx13B: IC6.A15 R184B.1 | length 44.6
  Top Layer w0.127: IC6.A15@85.915,43.984 v1(87.875,43.984) v1@87.966,43.984 ; v1(112.014,19.177) 112.467,19.177 112.629,19.015 R184B.1@112.67,19.056
  Int2 (Sign) w0.127: v1(87.875,43.984) 91.341,43.984 98.85,36.475 98.85,23.85 103.275,19.425 110.575,19.425 110.823,19.177 v1(112.014,19.177)
MLVDS_RxTx13C: IC6.C11 R184C.1 | length 32.7
  Top Layer w0.127: IC6.C11@84.34,47.209 v1(84.756,47.625) ; v1(104.075,56.625) 104.225,56.775 111.36,56.775 112.292,55.843 112.312,55.843 112.539,55.616 R184C.1@112.539,55.596
  Int2 (Sign) w0.127: v1(84.756,47.625) 84.781,47.65 92.9,47.65 95.7,50.45 97.9,50.45 v1(104.075,56.625)
MLVDS_RxTx13D: IC6.A5 R184D.1 | length 36.3
  Top Layer w0.127: IC6.A5@85.915,51.984 v1(89.741,51.984) ; v1(103.375,67.075) 103.375,67.45 104.925,69 110.7,69 112.068,67.632 112.386,67.632 R184D.1@112.474,67.544
  Int2 (Sign) w0.127: v1@89.793,52.036 89.977,52.036 90.983,53.042 91.17,53.042 93.1,54.973 93.1,55.525 93.9,56.325 95.425,56.325 98.25,59.15 98.25,61.95 v1(103.375,67.075)
MLVDS_RxTx13E: IC6.D5 R184E.1 | length 50.5
  Top Layer w0.127: IC6.D5@83.515,51.984 v1(83.906,52.375) ; v1(103.875,79.95) 111.453,79.95 112.227,79.176 112.247,79.176 112.474,78.949 R184E.1@112.474,78.929
  Int2 (Sign) w0.127: v1(83.906,52.375) 84.231,52.7 85.025,52.7 86.5,54.175 86.5,70.475 95.975,79.95 v1(103.875,79.95)
MLVDS_RxTx13F: IC6.A6 R184F.1 | length 63.3
  Top Layer w0.127: IC6.A6@85.915,51.184 96.034,51.184 98.725,53.875 98.725,56.35 99.9,57.525 99.9,88.175 103.475,91.75 111.153,91.75 112.227,90.676 112.247,90.676 112.474,90.449 R184F.1@112.474,90.429
MLVDS_RxTx14B: IC6.A14 R191B.1 | length 39.3
  Top Layer w0.127: IC6.A14@85.915,44.784 v1(87.859,44.784) ; v1(111.5,27.575) 111.5,22.726 112.423,21.803 112.443,21.803 112.67,21.576 R191B.1@112.67,21.556 R191B.1@112.639,21.525
  Int2 (Sign) w0.127: v1(87.859,44.784) 87.911,44.784 88.07,44.625 94.175,44.625 111.213,27.587 111.488,27.587 v1(111.5,27.575)
MLVDS_RxTx14C: IC6.B6 R191C.1 | length 47.2
  Top Layer w0.127: IC6.B6@85.115,51.184 85.524,50.775 v1(90.95,50.775) ; v1(104.853,57.55) 111.993,57.55 112.292,57.85 112.312,57.85 112.539,58.076 R191C.1@112.539,58.096
  Int2 (Sign) w0.127: v1(90.95,50.775) 92.675,50.775 93.925,52.025 95.452,52.025 95.9,52.473 95.9,52.725 96.125,52.95 96.17,52.995 ccw(c95.951,53.214) 96.17,53.433 96.037,53.565 cw(c96.256,53.784) 96.037,54.003 cw(c96.256,53.784) 96.475,54.003 97.453,53.025 ccw(c97.672,53.244) 97.891,53.025 ccw(c97.672,53.244) 97.891,53.463 96.913,54.441 cw(c97.131,54.66) 96.913,54.878 cw(c97.131,54.66) 97.35,54.878 98.328,53.9 ccw(c98.547,54.119) 98.766,53.9 ccw(c98.547,54.119) 98.766,54.338 97.788,55.316 cw(c98.007,55.535) 97.788,55.754 cw(c98.007,55.535) 98.226,55.754 99.204,54.776 ccw(c99.423,54.995) 99.641,54.776 ccw(c99.423,54.995) 99.641,55.213 98.663,56.191 cw(c98.882,56.41) 98.663,56.629 cw(c98.882,56.41) 99.101,56.629 100.079,55.651 ccw(c100.298,55.87) 100.517,55.651 ccw(c100.298,55.87) 100.517,56.089 99.539,57.067 cw(c99.758,57.286) 99.539,57.505 cw(c99.758,57.286) 99.977,57.505 100.955,56.527 ccw(c101.173,56.745) 101.392,56.527 ccw(c101.173,56.745) 101.392,56.964 101.335,57.022 cw(c101.554,57.241) 101.554,57.55 102.15,57.55 v1(104.853,57.55)
MLVDS_RxTx14D: IC6.C5 R191D.1 | length 37.8
  Top Layer w0.127: IC6.C5@84.315,51.984 84.706,52.375 v1(88.825,52.375) ; v1(103.35,68.525) 104.35,69.525 110.45,69.525 110.969,70.044 R191D.1@112.474,70.044
  Int2 (Sign) w0.127: v1(88.825,52.375) 89.6,53.15 89.6,54.5 92.575,57.475 94.7,57.475 97.25,60.025 97.25,62.425 v1(103.35,68.525)
MLVDS_RxTx14E: IC6.B13 R191E.1 | length 57.6
  Top Layer w0.127: IC6.B13@85.115,45.584 85.506,45.975 93.325,45.975 96.975,49.625 96.975,50.052 98.298,51.375 100.375,51.375 102.375,53.375 102.375,79.2 103.95,80.775 111.82,80.775 112.227,81.183 112.247,81.183 112.474,81.409 R191E.1@112.474,81.429
MLVDS_RxTx14F: IC6.A4 R191F.1 | length 63.8
  Top Layer w0.127: IC6.A4@85.915,52.784 89.591,52.784 90.75,51.625 95.775,51.625 97.9,53.75 97.9,58.275 99.025,59.4 99.025,88.475 102.9,92.35 111.895,92.35 112.227,92.683 112.247,92.683 112.474,92.909 R191F.1@112.474,92.929
MLVDS_RxTx15B: IC6.B14 R193B.1 | length 64
  Top Layer w0.127: IC6.B14@85.115,44.784 v1(85.506,45.175) ; R193B.1@112.553,22.979 R193B.1@112.63,23.056 v1(112.63,27.595)
  Int2 (Sign) w0.127: v1(85.506,45.175) 86.727,45.175 86.752,45.2 95.025,45.2 96.8,43.425 96.845,43.38 ccw(c97.064,43.599) 97.283,43.38 97.717,43.814 cw(c97.936,43.596) 98.155,43.814 cw(c97.936,43.596) 98.155,43.377 97.187,42.409 ccw(c97.406,42.191) 97.187,41.972 ccw(c97.406,42.191) 97.625,41.972 98.592,42.939 cw(c98.811,42.72) 99.03,42.939 cw(c98.811,42.72) 99.03,42.501 98.063,41.534 ccw(c98.282,41.315) 98.063,41.096 ccw(c98.282,41.315) 98.501,41.096 99.468,42.064 cw(c99.687,41.845) 99.905,42.064 cw(c99.687,41.845) 99.905,41.626 98.938,40.659 ccw(c99.157,40.44) 98.938,40.221 ccw(c99.157,40.44) 99.376,40.221 100.343,41.188 cw(c100.562,40.969) 100.781,41.188 cw(c100.562,40.969) 100.781,40.751 99.814,39.783 ccw(c100.032,39.564) 99.814,39.346 ccw(c100.032,39.564) 100.251,39.346 101.219,40.313 cw(c101.437,40.094) 101.656,40.313 cw(c101.437,40.094) 101.656,39.875 100.689,38.908 ccw(c100.908,38.689) 100.689,38.47 ccw(c100.908,38.689) 101.127,38.47 102.094,39.437 cw(c102.313,39.219) 102.532,39.437 cw(c102.313,39.219) 102.532,39 101.564,38.033 ccw(c101.783,37.814) 101.564,37.595 ccw(c101.783,37.814) 102.002,37.595 102.969,38.562 cw(c103.188,38.343) 103.407,38.562 cw(c103.188,38.343) 103.407,38.124 102.601,37.318 ccw(c102.82,37.099) 102.601,36.88 ccw(c102.82,37.099) 103.038,36.88 103.41,37.252 cw(c103.629,37.033) 103.848,37.252 cw(c103.629,37.033) 103.848,36.815 ccw(c104.067,36.596) 103.848,36.377 105.768,34.457 105.813,34.412 v1(112.63,27.595)
MLVDS_RxTx15C: IC6.C9 R193C.1 | length 33.1
  Top Layer w0.127: IC6.C9@84.34,48.784 v1(84.731,49.175) ; v1(104.475,58.725) 105.025,58.175 111.078,58.175 112.252,59.35 112.272,59.35 112.499,59.576 R193C.1@112.499,59.596
  Int2 (Sign) w0.127: v1(84.731,49.175) 85.531,49.975 89.6,49.975 90.574,50.949 90.574,50.951 90.788,51.165 91.89,51.165 93.85,53.125 94.8,53.125 100.4,58.725 v1(104.475,58.725)
MLVDS_RxTx15D: IC6.D6 R193D.1 | length 40.7
  Top Layer w0.127: IC6.D6@83.515,51.184 v1(83.875,51.544) ; v1(103.65,71.025) 105.25,71.025 106.125,70.15 109.875,70.15 111.269,71.544 R193D.1@112.434,71.544
  Int2 (Sign) w0.127: v1(83.875,51.544) 84.219,51.2 86.25,51.2 88.775,53.725 88.775,54.95 92.325,58.5 93.825,58.5 95.95,60.625 95.95,63.325 v1(103.65,71.025)
MLVDS_RxTx15E: IC6.A10 R193E.1 | length 56
  Top Layer w0.127: IC6.A10@85.915,47.984 86.606,48.675 94.375,48.675 95.65,49.95 96.225,49.95 98.275,52 99.8,52 101.575,53.775 101.575,79.35 103.75,81.525 111.03,81.525 112.187,82.683 112.207,82.683 112.434,82.909 R193E.1@112.434,82.929
MLVDS_RxTx15F: IC6.B4 R193F.1 | length 65.5
  Top Layer w0.127: IC6.B4@85.115,52.784 85.531,53.2 89.775,53.2 90.85,52.125 95.625,52.125 97.1,53.6 97.1,59.475 97.925,60.3 97.925,88.412 97.976,88.464 97.976,88.727 102.25,93 111.005,93 112.187,94.183 112.207,94.183 112.434,94.409 R193F.1@112.434,94.429
MOSI: D14.4 IC6.AB3 IC8A.14 P1.4 | length 139.9
  Top Layer w0.127: v1(68.715,53.984) IC6.AB3@69.115,53.584 ; v1(108.975,3.9) 109.025,3.95 IC8A.14@109.025,6.106
  Int2 (Sign) w0.127: v1(68.326,26.035) 76.581,17.78 83.203,17.78 83.338,17.915 83.662,17.915 83.797,17.78 88.795,17.78 91.25,15.325 91.25,13.5 93.613,11.137 95.438,11.137 102.475,4.1 107.2,4.1 107.4,3.9 v1(108.975,3.9)
  Bottom Layer w0.127: v1(68.326,26.035) 68.326,34.437 69.905,36.016 69.905,52.321 69.425,52.802 69.425,53.385 69.368,53.443 ; v1(68.715,53.984) 68.789,53.984 68.939,53.834 68.977,53.834 69.368,53.443 ; P1.4@90.195,92.992 90.195,92.92 88.525,91.25 88.525,89.7 88.528,89.697 88.528,89.373 88.3,89.145 87.976,89.145 87.821,89.3 D14.4@87.125,89.3 86.225,89.3 85.075,88.15 85.075,86 84.15,85.075 76.769,85.075 66.396,74.701 66.396,60.704 68.275,58.825 68.275,55.727 69.891,54.112 69.891,53.69 69.643,53.443 69.368,53.443
NetB1_1: B1.1 IC6.AF3 R229.1 | length 10.4
  Top Layer w0.127: B1.1@58.293,57.928 58.293,56.314 R229.1@58.255,56.276 59.504,56.276 60.901,54.879 63.825,54.879 65.12,53.584 IC6.AF3@65.915,53.584
NetC2_2: C2.2 R9.1 | length 1.7
  Top Layer w0.254: R9.1@10.16,62.192 10.16,63.742 C2.2@10.299,63.881
NetC3_2: C3.2 R93.1 | length 1.5
  Top Layer w0.254: R93.1@8.89,45.758 8.89,44.462 C3.2@9.029,44.323
NetC4_2: C4.2 R202.1 | length 1.4
  Top Layer w0.254: R202.1@12.754,45.444 12.754,44.535 C4.2@13.093,44.196
NetC7_2: C7.2 R19.1 | length 1.4
  Top Layer w0.254: R19.1@13.97,62.573 13.97,63.615 C7.2@14.236,63.881
NetC14_2: C14.2 C31.1 IC9.32 R95.2 | length 7.1
  Top Layer w0.254: IC9.32@48.41,70.996 50.171,70.996 C31.1@50.175,71
  Top Layer w0.381: C31.1@50.175,71 50.294,70.881 50.294,70.484 50.518,70.261 52.686,70.261 C14.2@52.925,70.5 52.779,70.646 52.779,71.104 53.65,71.975 R95.2@53.7,71.975
NetC21_2: C21.2 IC9.23 Q1.2 | length 7.6
  Top Layer w0.127: IC9.23@48.41,66.496 51.356,66.496 51.972,65.88 51.972,64.94 C21.2@52.089,64.823 53.902,64.823 Q1.2@54.534,64.19
NetC23_2: C23.2 IC9.24 Q1.1 | length 6.8
  Top Layer w0.127: IC9.24@48.41,66.996 50.613,66.996 50.859,66.75 51.999,66.75 C23.2@52.114,66.635 52.582,67.104 53.748,67.104 Q1.1@54.534,67.89
NetC24_1: C24.1 IC9.106 | length 3.9
  Top Layer w0.127: C24.1@23.074,56.453 23.117,56.496 IC9.106@26.96,56.496
NetC25_1: C25.1 IC9.71 | length 1.8
  Top Layer w0.254: C25.1@29.351,76.696 29.435,76.612 IC9.71@29.435,74.971
NetC39_2: C39.2 IC13.25 | length 6.1
  Top Layer w0.254: C39.2@37.606,40.465 42.085,40.465 42.827,39.723 43.386,39.723 IC13.25@43.409,39.7
NetC82_2: C82.2 IC11.4 Q2.2 | length 8.9
  Top Layer w0.127: Q2.2@30.453,7.865 31.359,8.771 C82.2@31.359,11.115 32.832,11.115 33.553,11.836 IC11.4@33.553,14.661
NetC83_2: C83.2 C87.2 IC11.6 | length 2.7
  Top Layer w0.203: IC11.6@34.553,14.661 34.553,13.614 C83.2@34.695,13.472 34.695,12.6 35.109,12.186 C87.2@35.109,12.161
NetC91_2: C91.2 IC11.5 Q2.1 | length 11.9
  Top Layer w0.152: IC11.5@34.053,14.661 34.053,11.471 34.409,11.115 C91.2@38.459,11.115 38.459,8.839 39.432,7.865 Q2.1@39.953,7.865
NetC102_1: C102.1 C103.1 J7.S1 J7.S2 R135.2 | length 25.1
  Top Layer w0.762: R135.2@9.425,8.121 9.425,9.885 9.403,9.907 9.403,10.837 J7.S2@9.09,11.15 J7.S1@9.09,26.64 9.533,26.64 10.579,27.686 C102.1@13.324,27.686 ; R135.2@9.45,8.25 9.519,8.181 9.519,6.572 C103.1@9.6,6.491
NetC108_2: C108.2 D22.6 FB2.1 IC9.102 | length 59.4
  Top Layer w0.152: FB2.1@20.839,7.112 C108.2@22.087,7.112 v1(22.087,10.48) 21.772,10.795 D22.6@21.772,12.445 ; v1(24.13,58.674) 24.197,58.674 24.375,58.496 IC9.102@26.96,58.496
  Bottom Layer w0.152: v1(22.087,10.48) 22.087,14.086 22.987,14.986 22.987,32.385 24.312,33.71 24.312,44.247 23.419,45.14 23.419,57.963 v1(24.13,58.674)
NetC109_2: C109.2 D22.5 FB1.1 R75.1 | length 10.4
  Top Layer w0.127: FB1.1@20.839,9.271 21.122,9.554 D22.5@21.122,12.445 21.122,13.108 21.336,13.322 22.33,13.322 23.787,11.865 R75.1@23.787,8.763
NetC128_1: C128.1 IC17.9 R246.2 | length 2.2
  Top Layer w0.137: C128.1@184.1,76.439 184.995,76.439 R246.2@185,76.434 185.045,76.389 IC17.9@186.3,76.389
NetC128_2: C128.2 R242.1 | length 0.9
  Top Layer w0.137: R242.1@182.52,76.439 C128.2@183.4,76.439
NetC129_2: C129.2 IC17.5 R245.2 | length 2.3
  Top Layer w0.137: IC17.5@188.15,77.739 188.15,78.851 R245.2@188.352,79.052 188.35,79.054 C129.2@188.35,79.964
NetC130_2: C130.2 IC17.6 IC17.7 R245.1 | length 3.7
  Top Layer w0.137: IC17.7@187.15,77.739 187.15,78.771 R245.1@187.412,79.032 ; C130.2@187.375,79.964 187.375,79.089 R245.1@187.412,79.052 R245.1@187.412,79.032 ; IC17.6@187.65,77.739 187.65,78.794 R245.1@187.412,79.032
NetC131_2: C131.2 IC17.10 IC17.11 R246.1 | length 3.7
  Top Layer w0.137: C131.2@184.1,75.494 R246.1@185,75.494 ; IC17.11@186.3,75.389 185.125,75.389 185.02,75.494 185.415,75.889 IC17.10@186.3,75.889
NetC142_2: C142.2 IC18.7 IC18.8 R282.1 | length 3.9
  Top Layer w0.127: IC18.7@49.9,83.325 R282.1@52.195,83.325 ; IC18.8@49.9,83.975 50.775,83.975 C142.2@51.3,83.45
NetD1_1: D1.1 IC10.2 | length 3.3
  Top Layer w0.127: D1.1@25.4,80.881 25.4,81.206 26.337,82.143 IC10.2@27.937,82.143
NetFB1_2: FB1.2 J9.1 | length 21.9
  Top Layer w0.203: FB1.2@19.039,9.271 19.512,9.744 19.512,10.442 19.558,10.488 v1(19.558,10.541)
  Bottom Layer w0.2: J9.1@2.89,17.6 2.89,16.254 3.952,15.192 7.208,15.192 11.859,10.541 v1(19.558,10.541)
NetFB2_2: FB2.2 J9.4 | length 24.2
  Top Layer w0.203: v1(17.3,12.7) 17.3,7.83 18.018,7.112 FB2.2@19.039,7.112
  Bottom Layer w0.2: J9.4@2.89,19.55 6.75,19.55 11.8,14.5 13,14.5 14.8,12.7 v1(17.3,12.7)
NetIC1_1: IC1.1 R286.2 | length 1.7
  Top Layer w0.127: R286.2@26.795,41.225 26.825,41.255 IC1.1@28.5,41.255
NetIC1_2: IC1.2 R285.2 | length 1.7
  Top Layer w0.127: R285.2@26.795,39.962 26.818,39.985 IC1.2@28.5,39.985
NetIC1_3: IC1.3 R284.2 | length 1.7
  Top Layer w0.127: R284.2@26.795,38.7 26.81,38.715 IC1.3@28.5,38.715
NetIC2_2: IC2.2 IC3.3 R15.2 | length 25.9
  Top Layer w0.127: IC3.3@13.941,56.696 13.941,55.587 14.532,54.996 16.539,54.996 19.304,52.232 19.304,41.84 v1(19.247,41.783) ; IC2.2@18.539,37.206 v1(19.685,37.206)
  Top Layer w0.254: IC3.3@13.941,56.696 13.941,58.175 R15.2@13.97,58.204
  Bottom Layer w0.127: v1(19.247,41.783) 19.247,40.993 19.218,40.964 19.218,37.503 19.548,37.174 19.653,37.174 v1(19.685,37.206)